# EAGLE board SmartWatch_PCB (EAGLE 9.7.0)
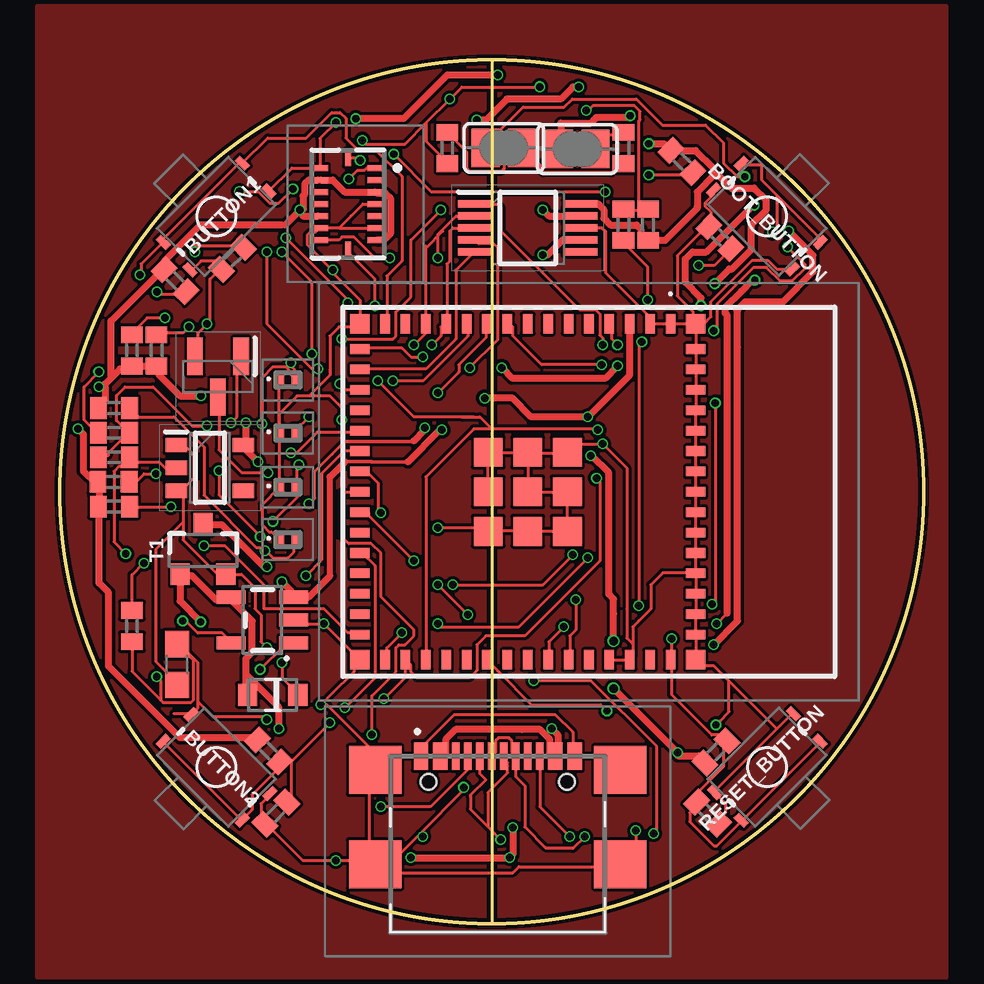
[diagram p0: board, top side]
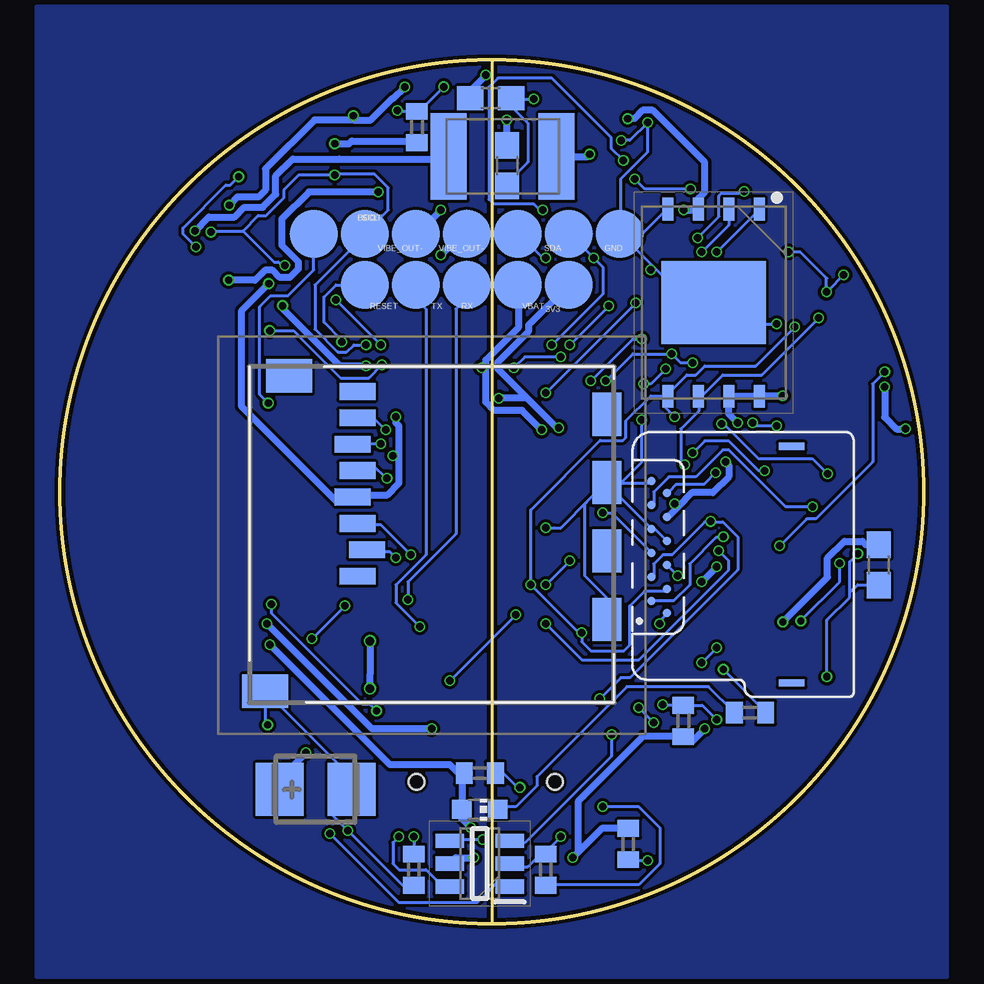
[diagram p1: board, bottom side, seen from below]

Size 36 x 36 mm. Coordinates in mm from the lower left corner, seen from the top.
Outline: circle at 18,18 radius 18
Copper layers (1*16): Top 0.035mm / dielectric 1.6mm / Bottom 0.035mm
Design rules "jlcpcb-2layers *": minimum track width 5mil, minimum drill 0.3mm, track to track 5mil, track to pad 5mil, pad to pad 5mil, via to via 5mil, smd to smd 5mil, copper to edge 0.15mm, drill to drill 0.3mm, minimum pad ring 10mil, minimum via ring 3mil, stop-mask expansion 4mil, vias tented up to drill 0mil, thermal gap 10mil

## Footprints (pad centres in the part's own frame; a part is rotated, then mirrored left to right if it is on the bottom)
SPARKFUN-SWITCHES_TACTILE_SWITCH_SMD_4.6X2.8MM = smd 0.3 x 0.6: 1 -2.355,-0.8; 2 2.304,-0.8; 3 2.33,0.8; 4 -2.329,0.8
EAGLE-LTSPICE_C0402 = smd 0.7 x 0.9: 1 -0.65,0; 2 0.65,0
RCL_C0603 = smd 1.1 x 1: 1 -0.85,0; 2 0.85,0
CT3528 = smd 2 x 2.2: + -1.5,0; - 1.5,0
ADAFRUIT_CHIP-LED0603 = smd 0.8 x 0.8: A 0,-0.75; C 0,0.75
AVX---SD0805S020S1R0_AVX_SD0805S020S1R0_0 = smd 0.8 x 0.9: 1 -1.05,0; 2 1.05,0
PESD5V0S1BL315 = smd 0.4 x 0.7: 1 -0.35,0; 2 0.35,0
SOT95P280X145-6N = smd 1.2 x 0.6: 1 -1.25,0.95; 2 -1.25,0; 3 -1.25,-0.95; 4 1.25,-0.95; 5 1.25,0; 6 1.25,0.95
SON127P800X600X80-9N = smd 0.95 x 0.45: 1 -3.9,1.905; 2 -3.9,0.635; 3 -3.9,-0.635; 4 -3.9,-1.905; 5 3.9,-1.905; 6 3.9,-0.635; 7 3.9,0.635; 8 3.9,1.905 | smd 3.45 x 4.35: 9 0,0
BMI085 = smd 0.675 x 0.25: 1 1.165,1.5; 2 1.165,1; 3 1.165,0.5; 4 1.165,0; 5 1.165,-0.5; 6 1.165,-1; 7 1.165,-1.5; 9 -1.165,-1.5; 10 -1.165,-1; 11 -1.165,-0.5; 12 -1.165,0; 13 -1.165,0.5; 14 -1.165,1; 15 -1.165,1.5 | smd 0.25 x 0.675: 8 0,-1.915; 16 0,1.915
SOT95P280X120-5N = smd 0.9 x 0.6: 1 -1.4,0.95; 2 -1.4,0; 3 -1.4,-0.95; 4 1.4,-0.95; 5 1.4,0.95
ESP32S3MINI1N8 = smd 0.8 x 0.4: 1 -7,5.95; 2 -7,5.1; 3 -7,4.25; 4 -7,3.4; 5 -7,2.55; 6 -7,1.7; 7 -7,0.85; 8 -7,0; 9 -7,-0.85; 10 -7,-1.7; 11 -7,-2.55; 12 -7,-3.4; 13 -7,-4.25; 14 -7,-5.1; 15 -7,-5.95; 31 7,-5.95; 32 7,-5.1; 33 7,-4.25; 34 7,-3.4; 35 7,-2.55; 36 7,-1.7; 37 7,-0.85; 38 7,0; 39 7,0.85; 40 7,1.7; 41 7,2.55; 42 7,3.4; 43 7,4.25; 44 7,5.1; 45 7,5.95 | smd 0.4 x 0.8: 16 -5.95,-7; 17 -5.1,-7; 18 -4.25,-7; 19 -3.4,-7; 20 -2.55,-7; 21 -1.7,-7; 22 -0.85,-7; 23 0,-7; 24 0.85,-7; 25 1.7,-7; 26 2.55,-7; 27 3.4,-7; 28 4.25,-7; 29 5.1,-7; 30 5.95,-7; 46 5.95,7; 47 5.1,7; 48 4.25,7; 49 3.4,7; 50 2.55,7; 51 1.7,7; 52 0.85,7; 53 0,7; 54 -0.85,7; 55 -1.7,7; 56 -2.55,7; 57 -3.4,7; 58 -4.25,7; 59 -5.1,7; 60 -5.95,7 | smd 1.2 x 1.2: 61 0,0; 66 -1.65,1.65; 67 -1.65,0; 68 -1.65,-1.65; 69 0,-1.65; 70 1.65,-1.65; 71 1.65,0; 72 1.65,1.65; 73 0,1.65 | smd 0.8 x 0.8: 62 -7,7; 63 -7,-7; 64 7,-7; 65 7,7
SOP50P490X110-10N = smd 1.4 x 0.3: 1 -2.2,1; 2 -2.2,0.5; 3 -2.2,0; 4 -2.2,-0.5; 5 -2.2,-1; 6 2.2,-1; 7 2.2,-0.5; 8 2.2,0; 9 2.2,0.5; 10 2.2,1
PCA6LA12HL3TR = smd 0.35 x 0.35: 1 -0.95,-6.25; 2 -0.45,-5.6; 3 0.05,-6.25; 4 0.55,-5.6; 5 1.05,-6.25; 6 1.55,-5.6; 7 2.05,-6.25; 8 2.55,-5.6; 9 3.05,-6.25; 10 3.55,-5.6; 11 4.05,-6.25; 12 4.55,-5.6 | smd 0.3 x 1.073: MP1 -2.392,-0.4; MP2 7.47,-0.4
USB4110GFA = smd 0.3 x 1.15: A1 -3.35,3.678; A4 -2.55,3.678; A5 -1.25,3.678; A6 -0.25,3.678; A7 0.25,3.678; A8 1.25,3.678; A9 2.55,3.678; A12 3.35,3.678; B1 3.05,3.678; B4 2.25,3.678; B5 1.75,3.678; B6 0.75,3.678; B7 -0.75,3.678; B8 -1.75,3.678; B9 -2.25,3.678; B12 -3.05,3.678 | smd 2.18 x 2: MP1 -5.11,-0.827; MP2 5.11,-0.827; MP3 -5.11,3.103; MP4 5.11,3.103 | hole 0.65: -2.89,2.603; 2.89,2.603
112ATAARR03ATTEND = smd 1.8 x 1.2: G1 10.6,10.4; G2 4.9,10.4; S1 7.75,10.4; S2 2.05,10.4 | smd 1.4 x 1.9: G3 13.6,-3.85; G4 0.45,-2.85 | smd 0.7 x 1.5: P1 8.8,0; P2 7.7,0.4; P3 6.6,0; P4 5.5,-0.2; P5 4.4,0; P6 3.3,-0.2; P7 2.2,0; P8 1.1,0
SPARKFUN-IC-POWER_SOT23-5 = smd 0.55 x 1.2: 1 -0.95,-1.3; 2 0,-1.3; 3 0.95,-1.3; 4 0.95,1.3; 5 -0.95,1.3
VARISTOR_CT/CN1812 = smd 1.5 x 3.6: 1 -2.25,0; 2 2.25,0
SOT96P240X120-3N = smd 1.55 x 0.65: 1 -0.85,0.96; 2 -0.85,-0.96; 3 0.85,0
EAGLE-LTSPICE_R0402 = smd 0.7 x 0.9: 1 -0.65,0; 2 0.65,0
SJ = smd 1.168 x 1.6: 1 -0.762,0; 2 0.762,0
SPARKFUN-DISCRETESEMI_SOT23-3 = smd 0.8 x 0.9: 1 -0.95,-1; 2 0.95,-1; 3 0,1.1
TP20R = smd 2 x 2: TP 0,0

## Placement (x,y rotation side)
BOOT_BUTTON  [SPARKFUN-SWITCHES_TACTILE_SWITCH_SMD_4.6X2.8MM]  29.48,29.48 315 top
BUTTON1  [SPARKFUN-SWITCHES_TACTILE_SWITCH_SMD_4.6X2.8MM]  6.52,29.48 45 top
BUTTON2  [SPARKFUN-SWITCHES_TACTILE_SWITCH_SMD_4.6X2.8MM]  6.52,6.52 135 top
C1  1uF  [EAGLE-LTSPICE_C0402]  23.49,29.13 90 top
C1_BAT  4.7uF  [EAGLE-LTSPICE_C0402]  12.31,3.31 270 bottom
C1_BAT1  4.7uF 0603  [RCL_C0603]  4.88,10.8 90 top
C1_BAT2  4.7uF 0603  [RCL_C0603]  18.04,34.4 0 bottom
C2  1uF  [EAGLE-LTSPICE_C0402]  24.52,29.13 90 top
C2_BAT  4.7uF  [RCL_C0603]  17.36,31.59 270 bottom
C3  100uF TANT C  [CT3528]  25.34,5.59 0 bottom
C4  100nF  [EAGLE-LTSPICE_C0402]  21.12,33.2 90 bottom
C4_USB  100nF  [EAGLE-LTSPICE_C0402]  18.5,6.27 0 bottom
C5  1uF  [EAGLE-LTSPICE_C0402]  27,4.6 315 top
C5_USB  4.7uF 0603  [RCL_C0603]  1.87,14.95 270 bottom
C6  100nF  [EAGLE-LTSPICE_C0402]  27.51,28.59 135 top
C7  100nF  [EAGLE-LTSPICE_C0402]  7.19,27.73 225 top
C8  100nF  [EAGLE-LTSPICE_C0402]  9,4.6 225 top
CHG_LED  [ADAFRUIT_CHIP-LED0603]  18.5,4.76 270 bottom
D1  AVX---SD0805S020S1R0_AVX_SD0805S020S1R0AVX_SD0805S020S1R0_0_0  [AVX---SD0805S020S1R0_AVX_SD0805S020S1R0_0]  8.87,9.53 180 top
D2  PESD3V3S1BLYL  [PESD5V0S1BL315]  9.5,22.66 0 top
D3  PESD3V3S1BLYL  [PESD5V0S1BL315]  9.5,20.45 0 top
D4  PESD3V3S1BLYL  [PESD5V0S1BL315]  9.5,18.19 0 top
D5  PESD3V3S1BLYL  [PESD5V0S1BL315]  9.5,16 0 top
D6  USBLC6-2SC6Y  [SOT95P280X145-6N]  18.5,2.5 180 bottom
IC2  W25Q256JVEIQ  [SON127P800X600X80-9N]  8.75,25.88 270 bottom
IC3  BMI085  [BMI085]  12,30 0 top
IC4  XC6220A331MR-G  [SOT95P280X120-5N]  6.25,19 0 top
IC5  ESP32-S3-MINI-1-N8  [ESP32S3MINI1N8]  19.5,18 270 top
IC6  DRV2605LDGST  [SOP50P490X110-10N]  19.5,29 0 top
J1  PCA-6-LA-12-HL-3-T_R  [PCA6LA12HL3TR]  5.1,17.5 270 bottom
J2  USB4110-GF-A  [USB4110GFA]  18.25,3.3 0 top
J3  112A-TAAR-R03_ATTEND  [112ATAARR03ATTEND]  23.6,23.28 270 bottom
MCP73831  SPARKFUN-IC-POWER_MCP73831  [SPARKFUN-IC-POWER_SOT23-5]  8.44,12.65 90 top
PFMF.050.1  500mA  [VARISTOR_CT/CN1812]  17.54,31.98 180 bottom
Q1  2N7002  [SOT96P240X120-3N]  6.59,22.8 270 top
R1-ESP  10K  [EAGLE-LTSPICE_R0402]  27.35,7.15 225 top
R1-ESP1  10K  [EAGLE-LTSPICE_R0402]  25.93,31.77 135 top
R1-ESP2  10K  [EAGLE-LTSPICE_R0402]  4.8,26.8 135 top
R1-ESP3  10K  [EAGLE-LTSPICE_R0402]  8.7,7.2 135 top
R1-USB  5K1  [EAGLE-LTSPICE_R0402]  15.75,2.25 90 bottom
R1_BAT  200  [EAGLE-LTSPICE_R0402]  7.23,8.79 180 bottom
R1_PWRUSB  100K  [EAGLE-LTSPICE_R0402]  10.02,8.45 270 bottom
R2-USB  5K1  [EAGLE-LTSPICE_R0402]  21.25,2.25 90 bottom
R2_BAT  2K  [EAGLE-LTSPICE_R0402]  3,12.4 90 top
R4  10K  [EAGLE-LTSPICE_R0402]  2.25,21.49 180 top
R5  10K  [EAGLE-LTSPICE_R0402]  3,23.89 270 top
R6  10K  [EAGLE-LTSPICE_R0402]  4.03,23.89 270 top
R6-ESP1  100K  [EAGLE-LTSPICE_R0402]  23.49,32.33 90 top
R7-ESP1  100K  [EAGLE-LTSPICE_R0402]  16.15,32.33 90 top
R8  10K  [EAGLE-LTSPICE_R0402]  2.23,18.41 180 top
R9  22  [EAGLE-LTSPICE_R0402]  2.25,17.38 0 top
R11  10K  [EAGLE-LTSPICE_R0402]  2.25,20.46 180 top
R12  10K  [EAGLE-LTSPICE_R0402]  2.25,19.44 180 top
RESET_BUTTON  [SPARKFUN-SWITCHES_TACTILE_SWITCH_SMD_4.6X2.8MM]  29.48,6.52 225 top
SJ1  [SJ]  21.56,32.28 180 top
SJ2  [SJ]  18.5,32.34 0 top
T1  20V/4.2A/52mΩ/1.4W  [SPARKFUN-DISCRETESEMI_SOT23-3]  5.97,15.55 0 top
TP1  TPTP20R  [TP20R]  21.17,28.76 0 bottom
TP2  TPTP20R  [TP20R]  19.04,28.76 180 bottom
TP3  TPTP20R  [TP20R]  14.79,26.62 0 bottom
TP4  TPTP20R  [TP20R]  12.66,28.75 0 bottom
TP5  TPTP20R  [TP20R]  16.91,26.63 0 bottom
TP6  TPTP20R  [TP20R]  16.91,28.76 0 bottom
TP7  TPTP20R  [TP20R]  14.79,28.75 0 bottom
TP8  TPTP20R  [TP20R]  25.42,28.75 0 bottom
TP9  TPTP20R  [TP20R]  23.3,26.63 0 bottom
TP10  TPTP20R  [TP20R]  23.3,28.76 0 bottom
TP11  TPTP20R  [TP20R]  19.04,26.63 0 bottom
TP12  TPTP20R  [TP20R]  21.17,26.63 0 bottom

## Library data of the parts
BOOT_BUTTON BUTTON1 BUTTON2 RESET_BUTTON = Library_Buttons; PROD_ID: SWCH-14139; SF_SKU: COM-08720
C1 C1_BAT C2 C4 C4_USB C5-C8 = Hector_Watch; SPICEMODEL: NONE; SPICEPREFIX: C
C1_BAT1 C1_BAT2 C2_BAT C3 C5_USB = Hector_Watch; SPICEPREFIX: C
CHG_LED PFMF.050.1 SJ1 SJ2 TP1 TP2 TP4-TP6 TP10 = Hector_Watch
D1 = Hector_Watch; CENTROID_NOT_SPECIFIED: No; DATASHEET: http://datasheets.avx.com/schottky.pdf; DIGIKEY_DESCRIPTION: DIODE SCHOTTKY 20V 1A 0805; DIGIKEY_PART_NUMBER: 478-7800-1-ND; LEAD_FREE: yes; MF: AVX; MOUSER_PART_NUMBER: 581-SD0805S020S1R0; MPN: SD0805S020S1R0; PACKAGE: 0805 (2012 metric); PREFIX: D; ROHS: yes; TEMPERATURE_RANGE_HIGH: +125°C; TEMPERATURE_RANGE_LOW: -55°C
D2-D5 = Hector_Watch; ARROW_PART_NUMBER: PESD3V3S1BLYL; ARROW_PRICE-STOCK: https://www.arrow.com/en/products/pesd3v3s1blyl/nexperia?region=nac; DESCRIPTION: PESD3V3S1BL - Low capacitance bidirectional ESD protection diode; HEIGHT: 0mm; MANUFACTURER_NAME: Nexperia; MANUFACTURER_PART_NUMBER: PESD3V3S1BLYL; MOUSER_PART_NUMBER: 771-PESD3V3S1BLYL; MOUSER_PRICE-STOCK: https://www.mouser.co.uk/ProductDetail/Nexperia/PESD3V3S1BLYL?qs=vLWxofP3U2zWoKHYJMVoKQ%3D%3D
D6 = Hector_Watch; ARROW_PART_NUMBER: USBLC6-2SC6Y; ARROW_PRICE-STOCK: https://www.arrow.com/en/products/usblc6-2sc6y/stmicroelectronics?region=nac; DESCRIPTION: Low Cap. ESD Protection Auto SOT-23-6 STMicroelectronics USBLC6-2SC6Y, Dual Uni-Directional TVS Diode Array, 6-Pin SOT-23; HEIGHT: 1.45mm; MANUFACTURER_NAME: STMicroelectronics; MANUFACTURER_PART_NUMBER: USBLC6-2SC6Y; MOUSER_PART_NUMBER: 511-USBLC6-2SC6Y; MOUSER_PRICE-STOCK: https://www.mouser.co.uk/ProductDetail/STMicroelectronics/USBLC6-2SC6Y?qs=gNDSiZmRJS%2FOgDexvXkdow%3D%3D
IC2 = Hector_Watch; ARROW_PART_NUMBER: W25Q256JVEIQ; ARROW_PRICE-STOCK: https://www.arrow.com/en/products/w25q256jveiq/winbond-electronics?region=nac; DESCRIPTION: 256M-bit Serial Flash Memory with uniform 4KB sectors and Dual/Quad SPI; HEIGHT: 0.8mm; MANUFACTURER_NAME: Winbond; MANUFACTURER_PART_NUMBER: W25Q256JVEIQ; MOUSER_PART_NUMBER: 454-W25Q256JVEIQ; MOUSER_PRICE-STOCK: https://www.mouser.co.uk/ProductDetail/Winbond/W25Q256JVEIQ?qs=qSfuJ%252Bfl%2Fd4o%2FNFUf7yCgA%3D%3D
IC3 = Hector_Watch; ARROW_PART_NUMBER: BMI085; ARROW_PRICE-STOCK: https://www.arrow.com/en/products/bmi085/bosch; DESCRIPTION: IMUs - Inertial Measurement Units High-performance IMU BMI085 for virtual and augmented reality applications; HEIGHT: 1mm; MANUFACTURER_NAME: BOSCH; MANUFACTURER_PART_NUMBER: BMI085; MOUSER_PART_NUMBER: 262-BMI085; MOUSER_PRICE-STOCK: https://www.mouser.co.uk/ProductDetail/Bosch-Sensortec/BMI085?qs=y6ZabgHbY%252ByGCM8LfWZyqA%3D%3D
IC4 = Hector_Watch; DESCRIPTION: LDO Voltage Regulators; HEIGHT: 1.2mm; MANUFACTURER_NAME: Torex; MANUFACTURER_PART_NUMBER: XC6220A331MR-G; MOUSER_PART_NUMBER: 865-XC6220A331MR-G; MOUSER_PRICE-STOCK: https://www.mouser.co.uk/ProductDetail/Torex-Semiconductor/XC6220A331MR-G?qs=AsjdqWjXhJ8ZSWznL1J0gg%3D%3D
IC5 = Hector_Watch; DESCRIPTION: WiFi Development Tools - 802.11 [Engineering Samples] SMD Module, ESP32-S3FN8, 8 MB SPI Flash, PCB Antenna; HEIGHT: 2.55mm; MANUFACTURER_NAME: Espressif Systems; MANUFACTURER_PART_NUMBER: ESP32-S3-MINI-1-N8; MOUSER_PART_NUMBER: 356-ESP32-S3-MINI1N8; MOUSER_PRICE-STOCK: https://www.mouser.co.uk/ProductDetail/Espressif-Systems/ESP32-S3-MINI-1-N8?qs=XAiT9M5g4x82rl6F%2FIYUQg%3D%3D
IC6 = Hector_Watch; ARROW_PART_NUMBER: DRV2605LDGST; ARROW_PRICE-STOCK: https://www.arrow.com/en/products/drv2605ldgst/texas-instruments?region=nac; DESCRIPTION: ERM & LRA Device Haptic Driver 2-5V BGA9 Texas Instruments DRV2605LDGST Piezo Haptic Motor Driver IC, 5 V, 10-Pin VSSOP; HEIGHT: 1.1mm; MANUFACTURER_NAME: Texas Instruments; MANUFACTURER_PART_NUMBER: DRV2605LDGST; MOUSER_PART_NUMBER: 595-DRV2605LDGST; MOUSER_PRICE-STOCK: https://www.mouser.co.uk/ProductDetail/Texas-Instruments/DRV2605LDGST?qs=asCBFxFfL1TjvcNdZsR2BA%3D%3D
J1 = Library_LCD; DESCRIPTION: CONN FFC BOTTOM 12POS 0.5MM R/A; HEIGHT: 2.808mm; MANUFACTURER_NAME: Adam Tech; MANUFACTURER_PART_NUMBER: PCA-6-LA-12-HL-3-T/R
J2 = Hector_Watch; DESCRIPTION: CONN USB 2.0 TYPE-C R/A SMT; HEIGHT: 3.26mm; MANUFACTURER_NAME: GCT (GLOBAL CONNECTOR TECHNOLOGY); MANUFACTURER_PART_NUMBER: USB4110-GF-A; MOUSER_PART_NUMBER: 640-USB4110-GF-A; MOUSER_PRICE-STOCK: https://www.mouser.co.uk/ProductDetail/GCT/USB4110-GF-A?qs=KUoIvG%2F9IlYiZvIXQjyJeA%3D%3D
J3 = Hector_Watch; DESCRIPTION: Micro SD Card Socket, Push-Push Type, Top Mount, SMT, H=1.83mm, 10u; HEIGHT: 1.9mm; MANUFACTURER_NAME: ATTEND; MANUFACTURER_PART_NUMBER: 112A-TAAR-R03 ATTEND
MCP73831 = Hector_Watch; PROD_ID: IC-09995
Q1 = Hector_Watch; ARROW_PART_NUMBER: 2N7002; ARROW_PRICE-STOCK: https://www.arrow.com/en/products/2n7002/on-semiconductor?region=europe; DESCRIPTION: N-channel MOSFET,2N7002 0.115A 60V; HEIGHT: 1.2mm; MANUFACTURER_NAME: onsemi; MANUFACTURER_PART_NUMBER: 2N7002; MOUSER_PART_NUMBER: 512-2N7002; MOUSER_PRICE-STOCK: https://www.mouser.co.uk/ProductDetail/onsemi-Fairchild/2N7002?qs=0dwsXDNhqlz66WJJhrTFjQ%3D%3D
R1-ESP R1-ESP1-R1-ESP3 R1-USB R1_BAT R1_PWRUSB R2-USB R2_BAT R4-R6 R6-ESP1 R7-ESP1 R8 R9 R11 R12 = Hector_Watch; SPICEMODEL: NONE; SPICEPREFIX: R
T1 = Hector_Watch; PROD_ID: TRAN-14388
TP3 = Hector_Watch; TP_SIGNAL_NAME: 3V3
TP7 = Hector_Watch; TP_SIGNAL_NAME: SDA
TP8 = Hector_Watch; TP_SIGNAL_NAME: PPG_INT
TP9 = Hector_Watch; TP_SIGNAL_NAME: RESET
TP11 = Hector_Watch; TP_SIGNAL_NAME: RX
TP12 = Hector_Watch; TP_SIGNAL_NAME: TX

## Nets
3V3: C1_BAT2.1 C2.1 C3.+ C4.1 IC2.3 IC2.7 IC2.8 IC3.3 IC3.7 IC3.11 IC3.14 IC4.5 IC5.3 IC6.10 J1.4 J3.P4 R1-ESP1.2 R1-ESP2.2 R1-ESP3.2 R1-ESP.2 R4.2 R5.2 R6.2 R8.2 R9.1 TP3.TP
ADC_BAT: IC5.9 SJ2.1
BOOT: BOOT_BUTTON.3 BOOT_BUTTON.4 C6.1 IC5.4 R1-ESP1.1 TP10.TP
BUTTON1: BUTTON1.3 BUTTON1.4 C7.1 IC5.15 R1-ESP2.1
BUTTON2: BUTTON2.3 BUTTON2.4 C8.1 IC5.26 R1-ESP3.1
D+: D6.1 IC5.24
D-: D6.3 IC5.23
DISP_RST: IC5.20 J1.11
DN: D6.4 J2.A7 J2.B7
DP: D6.6 J2.A6 J2.B6
EN_DRV: IC5.17 IC6.5
GND: BOOT_BUTTON.1 BOOT_BUTTON.2 BUTTON1.1 BUTTON1.2 BUTTON2.1 BUTTON2.2 C1.2 C1_BAT1.2 C1_BAT2.2 C1_BAT.2 C2.2 C2_BAT.2 C3.- C4.2 C4_USB.2 C5.2 C5_USB.2 C6.2 C7.2 C8.2 D2.1 D3.1 D4.1 D5.1 D6.2 IC2.4 IC2.9 IC3.4 IC3.6 IC3.10 IC3.15 IC4.2 IC5.1 IC5.2 IC5.42 IC5.43 IC5.46 IC5.47 IC5.48 IC5.49 IC5.50 IC5.51 IC5.52 IC5.53 IC5.54 IC5.55 IC5.56 IC5.57 IC5.58 IC5.59 IC5.60 IC5.61 IC5.62 IC5.63 IC5.64 IC5.65 IC5.66 IC5.67 IC5.68 IC5.69 IC5.70 IC5.71 IC5.72 IC5.73 IC6.8 J1.1 J1.5 J1.6 J1.12 J2.A1 J2.A12 J2.B1 J2.B12 J2.MP1 J2.MP2 J2.MP3 J2.MP4 J3.G1 J3.G2 J3.G3 J3.P6 MCP73831.2 Q1.2 R1-USB.2 R1_PWRUSB.1 R2-USB.1 R2_BAT.1 R7-ESP1.1 R12.1 RESET_BUTTON.1 RESET_BUTTON.2 TP4.TP
IMU_INT1: IC3.16 IC5.11
IMU_INT2: IC3.1 IC5.10
IN_DRV: IC5.16 IC6.4
LEDA: J1.3 R9.2
LEDK: J1.2 Q1.3
MISO: D2.2 IC2.2 IC5.33 J3.P7 R8.1
MOSI: D3.2 IC2.5 IC5.31 J1.10 J3.P3 R6.1
N$1: Q1.1 R11.1 R12.2
N$2: C1_BAT1.1 D1.1 IC4.1 IC4.3 T1.2
N$3: R6-ESP1.1 R7-ESP1.2 SJ2.2
N$4: J2.A5 R1-USB.1
N$5: R6-ESP1.2 SJ1.1
N$6: J2.B5 R2-USB.2
N$7: MCP73831.5 R2_BAT.2
N$12: MCP73831.1 R1_BAT.1
N$13: C1.1 IC6.1
N$14: CHG_LED.C R1_BAT.2
PIN_LED: IC5.30 R11.2
PPG_INT: IC5.36 TP8.TP
RESET: C5.1 IC5.45 R1-ESP.1 RESET_BUTTON.3 RESET_BUTTON.4 TP9.TP
RX: IC5.40 TP11.TP
SCK: D4.2 IC2.6 IC5.32 J1.9 J3.P5 R5.1
SCL: IC3.8 IC5.13 IC6.2 TP6.TP
SDA: IC3.9 IC5.12 IC6.3 TP7.TP
SS: D5.2 J3.P2 R4.1
SS_FLASH: IC2.1 IC5.18
SS_SD: IC5.7
SS_TFT: IC5.21 J1.8
TFT_DC: IC5.22 J1.7
TX: IC5.39 TP12.TP
VBAT: C2_BAT.1 MCP73831.3 SJ1.2 T1.3 TP5.TP
VBUS: C1_BAT.1 C4_USB.1 C5_USB.1 CHG_LED.A D1.2 D6.5 MCP73831.4 PFMF.050.1.2 R1_PWRUSB.2 T1.1
VIBE_OUT+: IC6.9 TP1.TP
VIBE_OUT-: IC6.7 TP2.TP
VUSB: J2.A4 J2.A9 J2.B4 J2.B9 PFMF.050.1.1

## Tracks (layer width: path | path; a pad name or v marks a point on that pad's centre or on a via)
3V3  (via drill 0.3, 0.35)
  Top 0.127: IC6.10 21.75,30 | v25.75,7.12 25.75,7 | 26.62,7 R1-ESP.2 | 1.62,17.5 R9.1 1.62,17.38 | 1.62,18.38 R8.2 | R1-ESP3.2 8.12,7.75 | 13.25,28.5 IC3.7 | 10.12,29.5 10.12,29.75 v10,29.75 | 10.75,29.5 IC3.11 | 10.75,31 IC3.14 10.88,31 | 13.12,30.5 IC3.3 13.21,30.46 | 7.75,19.75 7.75,19.88 IC4.5 7.75,20 | 1.88,21.75 1.62,21.5 R4.2 | 1.88,22.5 1.88,22.38 | 3,23.12 R5.2 | 4,23.25 R6.2 4.12,23.12 | 4.25,27.25 R1-ESP2.2 4.38,27.38 | 9.38,29.12 9.25,29.12 | 14.72,20.09 14.75,20.12 | 11.88,20.09 11.35,19.57 10.62,18.84 10.62,17.75
  Top 0.15: v10.38,17.5 10.62,17.75 | 14.72,20.09 13,20.09 12.98,20.1 11.89,20.1 11.88,20.09
  Top 0.3: 25.75,7 26.62,7 | IC5.3 23.75,23.08 23.75,22.88 v22,21.12 19.64,21.12 18.87,21.9 v17.71,21.9 | 23.75,9.12 24.06,8.82 | 24.06,8.82 24.69,8.18 v25.75,7.12 | 1.62,18.38 1.62,17.5 | 1.62,17.38 1.62,15.46 1.62,14.19 2.02,13.79 2.02,10.73 5,7.75 8.12,7.75 | 10.12,29.5 10.75,29.5 | 10.75,31 10.38,31 10.21,30.84 10.21,30.42 10.12,30.33 10.12,29.75 | v18.25,35.38 16.14,35.38 14.33,33.56 v12.33,33.56 | v8.25,19.25 7.75,19.75 | 7.75,20 v7.75,20.88 | 1.88,21.75 1.88,22.38 v1.62,22.38 | 2.12,22.75 2.5,23.12 3,23.12 | 2.12,22.75 1.88,22.5 | R5.2 4,23.25 | 4.25,27.25 2.12,25.12 2.12,22.75 | v5.88,22 5,22 4.12,22.88 4.12,23.12 | v10,29.75 9.38,29.12 | v0.75,20.62 0.97,20.4 0.97,18.87 1.51,18.34 R8.2 | 4.38,27.38 4.38,27.65 5.85,29.12 9.25,29.12 | v27.3,26.68 27.9,27.29 28.01,27.29 28.82,28.1 28.82,29.13 29.44,29.74 29.44,30.16 28.94,30.66 28.91,30.63 | 21.75,30 22.44,30 22.68,29.77 22.68,29.4 22.95,29.12 24.04,29.12 24.21,28.95 24.21,28.78 C2.1 25.23,28.48 26.54,29.79 | 24.6,32.46 v24.55,32.51 25.19,32.51 R1-ESP1.2 26.5,32.23 27.24,31.49 27.24,31.18 | 26.54,29.79 26.56,29.81 | 26.56,29.9 26.56,29.81 | 26.54,29.79 26.56,29.81 | 26.56,29.81 26.56,29.88 | 28.91,30.63 | 26.56,29.81 26.56,30.5 27.24,31.18 | v23.08,11.78 23.08,12.92 23.08,13.53 22.88,13.73 22.88,18.8 22.18,19.5 v22.12,19.5 | 24.06,8.82 v23.08,9.79 | 13.21,30.46 13.56,30.46 13.78,30.24 13.78,28.76 13.52,28.5 13.25,28.5 | 28.91,30.63 28.09,30.63 28.01,30.63 27.47,31.18 27.24,31.18 | v15.21,20.67 15.21,20.58 14.75,20.12 | 10.88,31 11.37,31 11.87,30.5 13.12,30.5
  Bottom 0.127: 21.12,32.62 C4.1 | 26.75,5.62 C3.+ | 23.75,17.88 J3.P4 23.88,17.75 24,17.62 24.5,17.62 | 21.88,19.75 v22.12,19.5 | 9.5,29.75 IC2.3 | 9.38,29.88 9.38,30.25 | 18.88,34.5 C1_BAT2.1 | 6.88,22 IC2.8 6.75,22 | v8.25,19.25 8.12,19.12 | 10.62,17 J1.4 | 8.12,21.88 IC2.7 | 16.48,21.86 16.52,21.9 | 10.25,17.38 v10.38,17.5
  Bottom 0.3: v25.75,7.12 26.75,6.12 26.75,5.62 | v22,21.12 22,20.88 21.88,20.75 21.88,19.75 21.88,18.78 21.87,18.77 21.87,18.36 22.35,17.88 23.75,17.88 | v10,29.75 9.5,29.75 | 18.88,34.5 18.88,34.75 v18.25,35.38 | 9.38,30.25 9.12,30.5 9.12,31.73 11.29,33.9 11.71,33.9 12.05,33.56 v12.33,33.56 | IC2.3 9.38,29.88 | 6.88,22 8,22 IC2.7 | 10.62,17 10.25,17.38 9.66,17.96 8.78,17.96 8.12,18.62 8.12,19.12 | 8.12,21.88 8.12,21.25 v7.75,20.88 | v5.88,22 6.75,22 | v1.62,22.38 1.62,21.11 1.14,20.62 v0.75,20.62 | 17.11,22.49 17.22,22.59 | 17.22,22.59 17.75,23.12 17.75,23.4 16.45,24.7 16.45,24.96 TP3.TP | 16.52,21.9 v17.71,21.9 | 17.22,22.59 16.48,21.86 15.29,20.67 v15.21,20.67 | 24.5,17.62 28.42,21.54 28.42,25.56 v27.3,26.68 | 21.12,32.62 23.84,32.62 23.96,32.51 v24.55,32.51 | v23.08,11.78 23.08,10.38 v23.08,9.79
ADC_BAT  (via drill 0.3)
  Top 0.127: IC5.9 18.75,25 18.88,24.88 18.88,24.5 20.08,23.29 v22.58,23.29 | SJ2.1 17.74,32.47 19.3,34.03 21.02,34.03 21.36,34.38 24.03,34.38 25.11,33.29 26.91,33.29 27.66,32.54 27.66,31.7 28.23,31.14 v28.55,31.14 | v27.25,24.71 27.39,24.85 27.39,25.83 28.26,26.69 28.91,27.35 29.46,27.35 30.02,26.78 30.52,26.78 31.05,27.31 31.05,27.49 v30.33,28.21
  Bottom 0.127: v22.58,23.29 23.12,22.75 24.31,22.75 25.76,24.21 26.27,24.71 v27.25,24.71 | v30.33,28.21 30.88,28.75 30.88,29 29.09,30.79 28.91,30.79 v28.55,31.14
BOOT  (via drill 0.3)
  Top 0.127: IC5.4 23,25 23,24.38 v23.25,24.13 v23.25,24.12 | 29.88,30.38 31.62,28.62 31.62,28.5 BOOT_BUTTON.3 | 29.88,30.38 29.25,31 29.25,31.62 28.5,31.62 BOOT_BUTTON.4 | v29.71,28.83 29.88,29 29.88,30.38 | C6.1 27.28,27.44 v26.63,27.44
  Top 0.13: R1-ESP1.1 26.29,31.21 25.62,31.21 v24.55,31.21 25.11,31.21
  Bottom 0.127: v23.25,24.12 23.75,24.12 24.04,23.83 24.43,23.83 25.38,24.78 25.38,26.62 23.25,28.75 TP10.TP 22.31,29.74 22.31,30.67 22.89,31.25 24.48,31.25 24.52,31.21 v24.55,31.21 | v29.71,28.83 29.66,28.88 28.38,28.88 | v26.63,27.44 26.75,27.44 26.89,27.58 27.08,27.58 28.38,28.88 | 28.38,28.88 27.73,29.52 27.41,29.52 26.66,30.26 26.66,30.59 26.09,31.16
  Bottom 0.13: 26.09,31.16 26.04,31.21 24.52,31.21
BUTTON1  (via drill 0.3)
  Top 0.127: R1-ESP2.1 5.25,26.25 4.12,26.25 v4.04,26.33 | v5.62,28 5.62,28.25 7.62,28.25 C7.1 | v3.33,27.04 3.38,27.09 3.38,27.5 4.25,28.38 BUTTON1.4 4.31,28.54 7.46,31.69 BUTTON1.3 8.66,32.75 10.27,32.75 11.33,33.81 11.67,33.81 11.92,33.57 11.92,32.75 12.43,32.23 13.17,32.23 14.25,31.15 14.25,27.62 13.62,27 13.62,25.07 IC5.15
  Bottom 0.127: v4.04,26.33 4,26.38 v3.33,27.04
  Bottom 0.13: v4.04,26.33 4.04,26.88 4.03,26.89 5.14,28 v5.62,28
BUTTON2  (via drill 0.3)
  Top 0.127: R1-ESP3.1 9.12,6.62 9.12,6.5 8,5.38 8,4.75 7.62,4.38 BUTTON2.4 7.5,4.38 4.38,7.5 BUTTON2.3 | v11.88,9 13.12,10.25 13.12,14.93 12.6,15.45 IC5.26 | 9.62,6.75 v11.25,8.38 | 9.62,6.75 9.25,6.75 R1-ESP3.1 | 9.62,6.75 9.62,5.25 9.5,5.12 C8.1 | 9.62,6.75 R1-ESP3.1
  Bottom 0.127: v11.88,9 v11.25,8.38
D+  (via drill 0.3)
  Top 0.127: v14.75,15.12 12.88,17 12.88,17.12 12.5,17.12 IC5.24 | v17,12.88 v15.75,14.12 | v24.75,3.75 24.88,3.88 24.88,7.38 22.12,10.12 v19.75,10.12
  Bottom 0.127: v15.75,14.12 v14.75,15.12 | v19.75,10.12 v17,12.88 | v24.75,3.75 21.88,0.88 18.62,0.88 17.88,1.62 17.25,1.62 D6.1
D-  (via drill 0.3)
  Top 0.127: IC5.23 11.75,18 11.75,16.12 12.04,15.84 12.98,15.84 13.38,15.44 13.38,13.62 14.75,12.25 14.75,12 14.38,11.62 14.12,11.62 14,11.5 14,10.5 13,9.5 v13,7.88
  Bottom 0.127: v13,7.88 13,7 16.62,3.38 17.25,3.38 D6.3
DISP_RST  (via drill 0.3)
  Top 0.127: v6.62,18.88 6.62,17.88 8.34,16.16 v8.34,16.12 | IC5.20 12.5,20.5 10.73,20.5 9.86,19.62 v9.62,19.62
  Bottom 0.127: v6.62,18.88 6.88,18.88 8.12,20.12 9.12,20.12 v9.62,19.62 | J1.11 10.43,13.45 9.75,14.12 9.75,15 8.66,16.09 8.37,16.09 v8.34,16.12
DN  (via drill 0.3)
  Top 0.127: 17.75,6 17.5,6.25 J2.B7 | 18.5,6.88 J2.A7 | 17.11,5.3 17.11,4.77 17.92,3.95 v18.37,3.5
  Top 0.13: 17.75,6 17.11,5.36 17.11,5.3 | 18.5,6.88 18.66,6.72 18.66,6.57 18.66,6.28 17.84,5.46 17.84,4.03 17.92,3.95
  Bottom 0.127: v18.37,3.5 19.7,3.5 D6.4
DP  (via drill 0.3)
  Top 0.127: 21.38,3.12 21.41,3.16 v21.88,3.62 | 19.38,4.03 19.38,5.75 19,6.12 19,6.88 J2.B6 18.84,7.14 18.84,7.63 18.73,7.75 18.27,7.75 18.16,7.63 18.16,7.14 J2.A6
  Top 0.13: 19.38,4.03 20.25,3.16 21.41,3.16
  Bottom 0.127: v21.88,3.62 22.12,3.38 22.12,2.5 21.88,2.25 20.75,2.25 20.12,1.62 19.75,1.62 D6.6
EN_DRV
  Top 0.127: IC6.5 17.25,28 16.5,27.25 16.5,24.38 15.25,23.12 12.53,23.12 IC5.17
GND  (via drill 0.3)
  Top 0.127: v24,3.88 24,3.12 23.38,2.5 J2.MP2 23.25,2.38 19.12,2.38 18.88,2.12 13.75,2.12 13.75,2.5 | BUTTON2.1 8.75,5.38 8.38,5 8.38,4.38 8.5,4.25 C8.2 8.62,4.12 10.12,2.62 v11.5,2.62 12.88,2.62 | 12.88,2.62 13.12,2.62 13.12,2.5 J2.MP1 | 13.75,2.5 15,3.75 | 13.75,2.5 13.25,2.5 J2.MP1 | 15,3.75 v15.12,3.62 | 13.75,2.5 J2.MP1 | IC4.2 4.75,19 4.38,19 4.12,19.25 3,19.25 3,19.38 R12.1 2.51,19.05 2.45,19.05 2.25,18.85 2.25,15.91 v2.74,15.42 | 5.75,9.25 5.75,9 5.5,8.75 BUTTON2.2 5.42,8.75 4.75,8.75 | 5.75,9.25 5.75,10.88 5,11.62 C1_BAT1.2 5.57,10.96 5.57,9.32 5.46,9.21 4.3,9.21 4.19,9.32 | 21.38,7 21.5,7 J2.A12 21.62,7 23.25,7 23.25,6.5 J2.MP4 | 21.38,7 J2.B1 21.38,7 | 15.12,7 15,7 J2.A1 14.88,7 13.25,7 | 15.12,7 J2.B12 15.12,7 | 13.25,7 13.25,6.5 J2.MP3 | MCP73831.2 9.75,12.62 9.75,12.5 v11,12.5 12.25,11.25 | 12.25,11.25 IC5.64 12.25,11.25 | 11,9.25 11.25,9.51 12.25,10.5 12.25,11.25 | 11,9.25 v10.88,9.12 11,9.25 | 12.88,7.38 11.39,8.86 | 12.88,7.38 13.25,7 | 13.25,7 J2.MP3 | 12.88,7.38 12.88,2.62 | 12.88,2.62 J2.MP1 | 12.88,7.38 J2.MP3 | 9.12,20.61 9.12,20.5 D3.1 9.12,20.38 9.12,18.25 D4.1 8.44,17.48 8.44,16.61 8.72,16.33 8.82,16.33 D5.1 | 9.12,20.61 9.12,22.62 D2.1 | 11.62,29 10.88,29 IC3.10 10.65,28.82 10.42,28.82 10.31,28.7 10.31,28.3 11.39,27.21 11.39,27.11 | 11.62,29 12.12,29.5 12.62,30 13.12,30 IC3.4 | 11.62,29 13.12,29 IC3.6 | 11.39,27.11 11.25,27.25 v11.38,27.25 | 11.39,27.11 12.5,26 IC5.63 12.5,24.88 11.62,24.88 11.25,24.5 11.25,23.08 11.25,23 | 9.12,20.61 9.12,21.25 9.88,22 10.38,22 11.25,22 11.75,21.5 v11.75,21 | C1.2 23.5,29.75 24.5,29.75 C2.2 24.13,30.17 24.13,33.45 24.19,33.51 24.19,33.86 23.94,34.1 22.23,34.1 22.02,33.9 v21.94,33.9
  Top 0.127: v11.5,33.39 10.84,32.73 IC3.15 9.67,31.5 BUTTON1.2 | BUTTON1.1 5.5,27.25 5.88,27.62 6.62,27.62 6.62,27.38 C7.2 6.62,27.25 6.25,26.88 6.25,25.12 v6.12,25 5.75,24.62 5.75,23.75 Q1.2 | 19.5,16.38 17.88,16.38 IC5.70 17.75,16.38 17.75,16.5 v15.75,16.5 | 19.5,16.38 IC5.71 19.5,16.38 | 19.5,16.38 21.12,16.38 | 21.12,16.38 IC5.72 21.12,16.38 | 19.5,19.62 17.88,19.62 IC5.68 | 19.5,19.62 IC5.67 | 19.5,19.62 IC5.61 21.12,18 | 19.5,19.62 IC5.67 | 21.12,18 IC5.73 21.12,18 | 19.5,19.62 21.12,19.62 IC5.66 21.25,19.75 21.25,20 v22.62,20 23.62,19 23.62,13.12 | 19.5,19.62 IC5.67 | 21.12,18 21.12,16.38 | C5.2 27.5,4.25 27.5,4.38 27.75,4.62 27.75,5 27.38,5.38 RESET_BUTTON.2 27.38,5.5 27.38,5.62 29.88,8.12 | 29.88,8.12 30.5,8.75 RESET_BUTTON.1 | IC5.42 23,11 IC5.43 23.88,11.12 23.88,11.65 23.88,12.38 24.12,12.62 | IC5.49 26.5,14.5 IC5.48 26.5,13 IC5.47 26.5,12.88 26.5,12.12 IC5.46 26.5,12 IC5.65 26.75,10.75 | 24.62,13.12 24.62,14.12 25.12,14.62 26.5,14.62 | 26.5,14.62 IC5.49 | 26.5,14.62 26.5,15.38 IC5.50 26.5,15.5 26.5,16.25 IC5.51 26.5,16.38 26.5,17.12 IC5.52 26.5,17.25 IC5.53 26.5,18.75 IC5.54 26.5,18.88 26.5,19.62 IC5.55 26.5,19.75 26.5,20.5 IC5.56 26.5,20.62 26.5,21.38 IC5.57 26.5,21.5 IC5.58 26.5,23 IC5.59 26.5,23.12 26.5,23.88 IC5.60 26.5,24 IC5.62 | 26.5,14.62 IC5.49 | 27.5,10.5 27.89,10.11 29.88,8.12 | IC5.62 26.38,25 | 26.38,25 25.5,25 IC5.1 25.38,25 24.62,25 IC5.2 24.5,25 24.5,25.38 22.75,27.12 22.75,28.84 22.59,29 IC6.8 | 26.38,25 IC5.62 | v4.03,10.29 4.19,10.13 4.19,9.32 | R2_BAT.1 3,10.51 4.19,9.32 | v20,34.88 16.75,34.88 v16.25,34.38 15.29,33.41 14.38,32.5 12.75,32.5 v12.61,32.65
  Top 0.127: BOOT_BUTTON.2 29.88,27.29 29.51,27.65 28.86,27.65 28.16,26.95 28.15,26.95 27.14,25.94 27.14,25.3 26.84,25 IC5.62 | v27.34,8.28 27.5,8.44 | 26.38,25 26.38,25.51 25.73,26.16 25.73,27.84 26.94,29.05 C6.2 27.12,29.12 27.12,29.67 26.91,29.89 26.91,30.05 27.25,30.39 BOOT_BUTTON.1 | 15.38,32.5 15.68,32.19 16.15,31.73 R7-ESP1.1 | v8.62,8.5 8.5,8.62 6.38,8.62 5.75,9.25 | 15.12,7 15.12,7.4 16.44,8.72 20.64,8.72 21.38,7.98 21.38,7 | 15,3.75 16.83,5.58 v16.83,5.67
  Top 0.13: IC5.69 IC5.68 | 27.5,8.44 27.89,8.83 27.89,10.11 | 27.5,10.5 27.25,10.75 26.75,10.75 | 15.68,32.19 15.29,32.59 15.29,33.41 | 11.39,8.86 11.12,9.12 v10.88,9.12 | 11.25,23.08 11.25,22.87 10.38,22 | 24.62,13.12 23.88,12.38 | 23.62,13.12 23.62,11.9 23.88,11.65
  Bottom 0.127: R2-USB.1 21.25,1.62 21.75,1.62 v24,3.88 24.62,4.5 24.62,4.75 23.88,5.5 C3.- 23.88,5.62 23.88,6.12 27.38,9.62 J3.G3 27.45,8.39 v27.34,8.28 | D6.2 17.12,2.38 16.5,2.38 16,2.88 15.75,2.88 R1-USB.2 15.75,3 v15.12,3.62 | v11.5,2.62 12.25,2.62 C1_BAT.2 | C4_USB.2 17.75,6.25 17.5,6.25 16.92,5.67 v16.83,5.67 | C5_USB.2 1.88,14.12 2.75,14.12 3.08,13.79 3.08,13.6 | v11,12.5 11,12.62 10.75,12.88 J1.12 | v10.88,9.12 10.12,9.12 R1_PWRUSB.1 9.22,9.1 v8.62,8.5 | 17,34.38 17.12,34.38 C1_BAT2.2 17,34.38 | 17,34.38 v16.25,34.38 | 17,34.38 17,33.88 16.5,33.38 16.5,31.75 17.25,31 17.25,30.75 C2_BAT.2 | 12.62,28.75 12,28.75 | 12,28.75 11.75,28.75 10.75,29.75 IC2.4 | 12.62,28.75 TP4.TP | 12.62,28.75 TP4.TP | v6.12,25 7.88,25 IC2.9 8.87,26 9.88,26 11.25,27.38 | 12,28.75 12,28.12 11.25,27.38 | 12,28.75 TP4.TP | 11.25,27.38 v11.38,27.25 | J1.6 10.75,16 11.25,16.5 J1.5 11.38,16.5 13.25,18.38 | J1.1 11.38,18.38 13.12,18.38 J3.G2 | 13.25,18.38 J3.G2 | 14.12,16.5 14.12,14.5 13.25,13.62 13.25,12.75 J3.G1 | 13.25,18.38 13.91,17.72 15.12,16.5 15.39,16.5 v15.75,16.5 | 13.25,18.38 J3.G2 | v22.62,20 23.75,20 J3.P6 | v11.75,21 11.75,19.23 12.6,18.38 J3.G2 | v4.03,10.29 4.03,12.65 3.08,13.6 | v20,34.88 21.03,33.85 C4.2 21.89,33.85 v21.94,33.9 | v2.74,15.42 3.08,15.07 3.08,13.6 | v11.5,33.39 11.5,32.18 12.62,31.05 12.62,28.75
  Bottom 0.13: 14.12,16.5 14.12,17.5 13.91,17.72 | v11.5,33.39 12.25,32.65 v12.61,32.65
IMU_INT1  (via drill 0.3)
  Top 0.127: v15.88,29.75 14.62,28.5 14.62,26.12 14,25.5 14,24.5 13.88,24.38 v11.75,24.38 | v13.88,22.62 15.12,22.62 17,24.5 17,25 IC5.11 | v12.52,31.81 12.42,31.91 IC3.16
  Bottom 0.127: v15.88,29.75 16,29.75 16.25,30.01 17.94,30.01 18.12,30.19 18.12,34.88 17.75,35.25 15.5,35.25 13.02,32.77 13.02,32.32 v12.52,31.81 | v11.75,24.38 12.12,24.38 v13.88,22.62
IMU_INT2  (via drill 0.3)
  Top 0.127: v12,25.88 12,26 v9.42,28.58 | v15.75,22.12 16.62,23 16.62,23.3 17.75,24.43 17.75,25 IC5.10 | v7.48,30.52 8.26,30.52 8.74,30.04 9.12,30.04 v9.71,30.62 | v12.04,31.04 12.4,31.4 12.69,31.4 12.79,31.5 IC3.1
  Bottom 0.127: v15.75,22.12 v12,25.88 | v7.48,30.52 7.55,30.45 8.42,30.45 8.53,30.33 8.53,29.47 v9.42,28.58 | v9.71,30.62 11.62,30.62 v12.04,31.04
IN_DRV  (via drill 0.3)
  Top 0.127: v15.12,23.62 14.62,23.62 14.25,24 12.5,24 IC5.16 | v17.08,23.17 18.25,24.34 18.25,28.17 18.08,28.34 17.46,28.34 IC6.4
  Bottom 0.127: v15.12,23.62 16.62,23.62 v17.08,23.17
LEDA  (via drill 0.3)
  Top 0.127: v4.62,17.38 3,17.38 R9.2
  Bottom 0.127: v4.62,17.38 5.75,17.38 8.12,19.75 8.38,19.75 9.5,18.62 10.62,18.62 11.25,18 11.25,17.5 J1.3
LEDK  (via drill 0.3)
  Top 0.127: Q1.3 6.62,21.88 6.62,19.75 7.58,18.79 v8.67,18.79
  Bottom 0.127: J1.2 10.62,18 10.32,18.31 9.16,18.31 v8.67,18.79
MISO  (via drill 0.3)
  Top 0.127: v4,18.75 3.5,18.75 3.25,18.5 3,18.5 R8.1 | v9.25,28 10.5,26.75 v10.5,23.75 | v9.62,23.38 9.5,23.38 9.75,23.12 9.75,22.75 D2.2 9.54,22.97 9.54,23.09 9.43,23.2 8.87,23.2 8.42,22.75 v8.42,20.83 | IC5.33 15.25,18.62 17.25,20.62 18,20.62 22.38,20.62 v22.42,20.58 | v13.25,22.62 14.75,21.12 16.73,21.12 17.25,21.12
  Top 0.13: 16.73,21.12 17.5,21.12 18,20.62
  Bottom 0.127: v4,18.75 4.62,19.38 6.88,19.38 8.33,20.83 v8.42,20.83 | v9.25,28 8.12,29.12 IC2.2 | v9.62,23.38 10.12,23.38 v10.5,23.75 12.12,23.75 v13.25,22.62 | J3.P7 23.5,21.12 22.96,21.12 v22.42,20.58
MOSI  (via drill 0.3)
  Top 0.127: v5.38,24.88 5.12,24.62 4.12,24.62 R6.1 | v14.25,12.12 13.62,11.5 13.62,11.07 IC5.31 | v21.38,15.38 20.12,14.12 v16.38,14.12 | D3.2 9.85,20.6 v10.38,21.12
  Bottom 0.127: v10.38,21.12 10.75,21.5 10.75,21.88 IC2.5 | v5.38,24.88 7,23.25 9.12,23.25 9.5,22.88 9.88,22.88 10.75,22 | 10.75,22 IC2.5 | 14.25,12 v14.25,12.12 14.25,12 | 14.25,12 14.25,11.75 13.88,11.38 12.5,11.38 12.25,11.62 12.25,13.25 11.62,13.88 10.78,13.88 J1.10 | v21.38,15.38 22.62,16.62 23.5,16.62 J3.P3 | 14.25,12 v16.38,14.12 16.38,17.25 13.49,20.14 12.52,20.14 12.41,20.25 12.41,20.97 11.38,22 10.75,22 | 10.75,22 IC2.5
N$1  (via drill 0.3)
  Top 0.127: 2.75,20.38 2.88,20.5 R11.1 2.75,20.38 | 2.75,20.38 2,19.62 2,19.5 1.62,19.5 R12.2 | v7.12,20.88 7.38,21.12 7.38,23.5 7.5,23.62 Q1.1 | v6.12,20.75 5.5,20.75 3.88,22.38 2.72,22.38 2.36,22.02 2.36,20.96 2.75,20.57 2.75,20.38
  Bottom 0.127: v7.12,20.88 7,20.75 v6.12,20.75
N$2  (via drill 0.3)
  Top 0.127: 5.12,18.12 4.88,18.12 IC4.3 5.12,18.12 | IC4.1 4.88,19.88 5.25,19.88 5.58,19.55 5.58,18.58 5.12,18.12 | 5.12,18.12 5.12,16.73 5.12,16 6.5,14.62 6.85,14.62 T1.2 7.57,14.55 8.12,14 8.12,13.12 8.38,12.88 8.38,11.75 v8.62,11.5 | v9.25,10.88 9.25,10.25 9.88,9.62 D1.1 | 4,14.88 4,10.91 4.88,10.03 C1_BAT1.1
  Top 0.13: 4,14.88 4,15.61 5.12,16.73
  Bottom 0.127: v8.62,11.5 v9.25,10.88
N$3
  Top 0.127: 19.25,32.39 SJ2.2 | R7-ESP1.2 16.96,32.16 16.96,31.46 17.07,31.35 18.4,31.35 18.51,31.46 18.51,31.66 19.25,32.39 | R6-ESP1.1 23.38,31.68 22.99,31.29 20.14,31.29 20.03,31.41 20.03,31.62 19.25,32.39
N$4  (via drill 0.3)
  Top 0.127: J2.A5 17,6.43 15.44,4.88 v13.38,4.88
  Bottom 0.127: v13.38,4.88 11.88,4.88 11,4 11,2.5 11.88,1.62 15.75,1.62 R1-USB.1
N$5
  Top 0.127: R6-ESP1.2 23.38,32.88 22.38,32.88 22.38,32.38 SJ1.1
N$6  (via drill 0.3)
  Top 0.127: v21.25,3.62 20,4.88 20,6.88 J2.B5
  Bottom 0.127: v21.25,3.62 21.25,3 R2-USB.2
N$7  (via drill 0.3)
  Top 0.127: MCP73831.5 7.12,11.75 6.77,12.11 5.74,12.11 5.24,12.61 v5.11,12.61 | R2_BAT.2 3,14.54 3.48,15.02 v3.5,15.02
  Bottom 0.127: v5.11,12.61 5.11,12.64 3.5,14.25 v3.5,15.02
N$8
  pour Bottom: -0.98,-2.25 36.98,-2.25 36.98,38.25 -0.98,38.25
N$11
  pour Top: -0.98,-2.25 36.98,-2.25 36.98,38.25 -0.98,38.25
N$12  (via drill 0.3)
  Top 0.127: MCP73831.1 9.62,11.62 9.38,11.62 v8.35,10.6
  Bottom 0.127: R1_BAT.1 6.59,8.83 v8.35,10.6
N$13  (via drill 0.3)
  Top 0.127: v24.5,26 24.5,27.38 23.5,28.38 C1.1 | IC6.1 17.38,30 18.25,30 18.38,29.88 18.38,28.88 21.66,25.59 22.33,25.59 22.51,25.41 22.51,24.52 22.62,24.41 v22.62,24.12
  Bottom 0.127: v24.5,26 v22.62,24.12
N$14
  Bottom 0.127: CHG_LED.C 17.63,4.88 17,4.88 16.12,5.75 16.12,6.12 12.38,9.88 8.97,9.88 R1_BAT.2
PIN_LED  (via drill 0.3)
  Top 0.127: v6,15.75 6.88,15.75 8.5,14.12 8.5,13.12 11,13.12 12,12.12 12.43,12.12 IC5.30 | R11.2 1.5,20.5 1,21 1,22.38 v1.62,23
  Bottom 0.127: v6,15.75 4.88,16.88 4.5,16.88 2.12,19.25 2.12,22.5 v1.62,23
PPG_INT  (via drill 0.3)
  Top 0.127: v27.19,13.31 27.32,13.44 v27.32,21.7 | v22.8,8.86 22.54,9.12 19.66,9.12 18.26,10.52 18.26,10.54 IC5.36
  Bottom 0.127: v27.19,13.31 27.19,12.94 23.41,9.16 23.1,9.16 v22.8,8.86 | v27.32,21.7 27.67,22.06 27.67,25.72 27.22,26.17 26.49,26.17 25.42,27.24 TP8.TP
RESET  (via drill 0.3)
  Top 0.127: RESET_BUTTON.4 31.62,7.5 28.5,4.38 RESET_BUTTON.3 28.38,4.25 27.38,3.25 27.25,3.25 26.25,4.25 26.25,4.62 26.5,4.88 26.5,5 C5.1 26.62,5.12 26.62,5.52 27.65,6.54 27.65,7.45 R1-ESP.1 27.56,7.86 27.17,7.86 25.5,9.53 25.5,11 | 25.5,11 IC5.45 25.5,11 | v24.12,13.25 24.12,24.12 v24.25,24.25 | 25.5,11 v25.5,11.88
  Bottom 0.127: v25.5,11.88 v24.12,13.25 | TP9.TP 23.38,26.62 24.5,26.62 25,26.12 25,25.07 24.25,24.32 v24.25,24.25
RX  (via drill 0.3)
  Top 0.127: v21.5,13.5 21.5,12.25 21.25,12 21.25,11 IC5.40
  Bottom 0.127: v21.5,13.5 21.5,14.25 19.5,16.25 19.5,25.62 19.12,26 19.12,26.62 TP11.TP
SCK  (via drill 0.3)
  Top 0.127: v4.38,25.25 3.62,25.25 3,24.62 R5.1 | 16.73,10.25 14.88,10.25 14.62,10.5 14.62,10.78 IC5.32 14.38,10.97 14.38,10.25 v13.5,9.38 | 17.38,11.62 17.75,12 19.38,12 22.5,15.12 22.5,18.44 v22.37,18.56 | v9.96,19.12 9.96,19.08 9.88,19 9.88,18.25 D4.2 9.88,18.12 9.88,17.77 v8.87,16.77
  Top 0.13: 17.38,11.62 17.38,10.55 17.07,10.25 16.73,10.25
  Bottom 0.127: 8.86,16.75 9.12,16.75 10.5,15.38 10.88,15.38 11.25,15 11.25,14.5 J1.9 | v4.38,25.25 6.75,22.88 8.38,22.88 9.38,21.88 | 9.38,21.88 IC2.6 9.38,21.88 | 9.38,21.88 9.38,21.38 10.12,20.62 10.12,19.29 v9.96,19.12 | J3.P5 23.5,19 23.38,19.12 22.96,19.12 22.4,18.56 v22.37,18.56 | v13.5,9.38 12.62,10.25 12.25,10.25 7.75,14.75 7.75,16.12 8.38,16.75 8.86,16.75 | v8.87,16.77 8.86,16.75
SCL  (via drill 0.3)
  Top 0.127: v13.12,25.75 13.12,26.88 12,28 IC3.8 | v14.75,24.12 15.25,24.62 IC5.13 15.25,28.16 | 15.25,28.16 15.25,28.25 | IC6.2 17.25,29.5 16.73,29.5 16.52,29.5 16.36,29.34 15.95,28.94 | v15.75,27.75 15.75,28.73 15.95,28.94 | 15.25,28.16 15.95,28.86 15.95,28.94
  Bottom 0.127: v14.75,24.12 v13.12,25.75 | v15.75,27.75 15.88,27.75 16.88,28.76 TP6.TP
SDA  (via drill 0.3)
  Top 0.127: IC6.3 17.25,29 16.38,29 16.25,28.88 16.25,27.62 16.12,27.5 16.12,25 IC5.12 16,25 15.88,24.88 15.88,24.5 v15.5,24.12 | v13.75,27.75 13.12,27.75 12.25,28.62 11.75,28.62 11.62,28.5 10.88,28.5 IC3.9
  Bottom 0.127: TP7.TP 14.75,28.75 v13.75,27.75 13.38,27.38 13.38,26.25 v15.5,24.12
SS  (via drill 0.3)
  Top 0.127: 8.5,15.62 8.88,15.25 9.5,15.25 9.75,15.5 9.75,16 D5.2 | v22,15.25 19.12,12.38 15.75,12.38 v15.75,12.5 | R4.1 3.27,21.12 4.75,21.12 6,19.88 6,17.86 8.19,15.67 8.45,15.67 8.5,15.62 | 8.5,15.62 8.5,15.59 v8.54,15.54
  Bottom 0.127: v22,15.25 22.25,15.5 23.12,15.5 J3.P2 | v15.75,12.5 14.25,11 11.88,11 8.12,14.75 8.12,15.12 v8.54,15.54
SS_FLASH  (via drill 0.3)
  Top 0.127: v10.75,23.12 10.5,23.12 8.62,25 v8.62,28 | IC5.18 11.92,22.25 v11.67,22.5
  Bottom 0.127: v10.75,23.12 11.38,22.5 v11.67,22.5 | v8.62,28 6.88,29.75 IC2.1
SS_TFT  (via drill 0.3)
  Top 0.127: IC5.21 11.84,19.7 10.91,18.77 10.91,15.16 v10.25,14.5
  Bottom 0.127: v10.25,14.5 10.62,14.88 J1.8
TFT_DC  (via drill 0.3)
  Top 0.127: v13.38,17.12 13.25,17.25 13.25,18.38 12.88,18.75 12.5,18.75 IC5.22
  Bottom 0.127: v13.38,17.12 13,17.12 11.38,15.5 J1.7
TX  (via drill 0.3)
  Top 0.127: v21,12.38 20.38,11.75 20.38,11 IC5.39
  Bottom 0.127: v21,12.38 22,13.38 22,14.12 20.75,15.38 20.75,25.62 21.12,26 21.12,26.62 TP12.TP
VBAT  (via drill 0.3)
  Top 0.127: 22.12,33.38 22.25,33.5 | 20.88,32.38 SJ1.2 | 8.5,14.88 v8.62,14.88 | 9.62,13.88 9.62,13.62 MCP73831.3 | 15.83,20.58 v15.92,20.58 | 6,16.62 T1.3
  Top 0.15: 14.5,19.25 12.99,19.25 12.98,19.25 11.88,19.25
  Top 0.25: 11.25,14.5 11.25,18.62
  Top 0.3: v17.38,33.5 17.75,33.5 18.62,34.38 20.54,34.38 20.88,34.38 21.38,34.88 v21.62,34.88 | 22.12,33.38 20.88,33.38 20.88,32.38 | 9.62,13.88 v9.25,14.25 | 11.25,14.5 10.38,13.62 9.76,13.62 MCP73831.3 | v18.42,23.17 18.84,22.75 22.75,22.75 v23.25,23.25 | 14.5,19.25 15.83,20.58 | v26.72,25.75 26.72,26.08 26.07,26.73 26.07,27.7 26.37,27.99 26.95,27.99 28.9,29.95 v28.94,29.95 | 11.25,18.62 11.88,19.25 | 6,16.62 6.75,16.62 7.88,15.5 8.5,14.88 | v23.77,33.68 23.69,33.61 22.36,33.61 22.25,33.5
  Bottom 0.127: 17.38,32.5 C2_BAT.1 | 18.25,23 18.25,23.12 18.38,23.12 v18.42,23.17 | 16.88,26.62 TP5.TP
  Bottom 0.3: 17.38,32.5 v17.38,33.5 | v9.25,14.25 v8.62,14.88 | 16.88,26.62 16.88,24.88 18.25,23.5 18.25,23.12 | v23.25,23.25 24.33,23.25 26.72,25.64 v26.72,25.75 | 18.25,23 18.25,21.73 17.91,21.39 16.73,21.39 v15.92,20.58 | 23.77,33.5 25.39,33.5 27.43,31.46 27.43,30.58 27.72,30.28 28.61,30.28 v28.94,29.95 | 23.77,33.5 23.05,33.5 22.14,34.4 22.1,34.4 v21.62,34.88 | 23.77,33.5 v23.77,33.68 23.77,33.5
VBUS  (via drill 0.3)
  Top 0.127: 7.25,13.38 7.25,13.5 MCP73831.4 7.12,13.5 | D1.2 7.75,9.62 | 5.12,14.5 T1.1 5,14.5 | 18.88,2.88 v18.75,2.75
  Top 0.3: 7.25,13.38 8,12.62 8.02,12.61 8.02,11.31 7.75,11.04 7.75,10.38 | 5.12,14.5 5.5,14.5 6.5,13.5 7.12,13.5 | v18.88,4 18.88,2.88 | v14.62,2.75 v18.75,2.75 | 5,14.5 5,13.44 v5.86,12.57 | v30.38,28.88 31.31,27.94 31.39,27.86 31.39,27.17 30.15,25.93 28.57,25.93 28.21,25.57 28.25,25.53 28.25,24.02 28.25,12.62 v27.25,11.62 | 7.75,9.62 7.75,10.38 | v9.12,8.12 9.12,9.01 7.75,10.38
  Bottom 0.127: 19.25,4.88 CHG_LED.A 19.25,4.38 | 10.25,7.62 10.12,7.75 R1_PWRUSB.2 10.25,7.62 | 12.38,4 C1_BAT.1 | 19.88,31.88 PFMF.050.1.2 | 10.25,7.62 9.62,7.62 | 2.55,15.94 2.41,15.8 | 19.25,6.12 19.25,6.25 C4_USB.1 19.25,6.12
  Bottom 0.3: 19.25,4.88 19.25,6.12 19.75,6.62 20.54,6.62 22.25,6.62 v27.25,11.62 | 19.25,4.38 v18.88,4 | 13.88,3.5 13.88,3.49 14.4,2.97 | 14.4,2.97 v14.62,2.75 | 9.62,7.62 v9.12,8.12 | 2.41,15.8 C5_USB.1 | 19.88,31.88 24.35,31.88 26.3,31.88 27,31.18 27,30.4 27.55,29.86 28.32,29.86 28.73,29.45 29.8,29.45 v30.38,28.88 | v18.75,2.75 19.5,2.75 D6.5 | C1_BAT.1 13.41,3.96 14.4,2.97 | R1_PWRUSB.2 11.7,7.79 14.19,5.3 14.4,5.09 14.4,2.97 | v5.86,12.57 4,14.44 4,15.23 3.3,15.94 2.55,15.94
VIBE_OUT+  (via drill 0.3)
  Top 0.127: 21.62,29.5 IC6.9
  Top 0.3: v20.12,29.75 20.38,29.5 21.62,29.5
  Bottom 0.127: 21.12,28.75 TP1.TP
  Bottom 0.3: v20.12,29.75 21.12,28.75
VIBE_OUT-  (via drill 0.3)
  Top 0.127: IC6.7 21.62,28.5
  Top 0.3: v20.12,27.88 20.33,27.88 20.96,28.5 21.62,28.5
  Bottom 0.127: 19.12,28.88 TP2.TP
  Bottom 0.3: v20.12,27.88 19.12,28.88
VUSB  (via drill 0.3)
  Top 0.127: 16,7 15.75,7 J2.A4 | 16,7 J2.B9 16,7 | 20.5,7 20.75,7 J2.A9 | 20.5,7 J2.B4 20.5,7 | v27.38,12.5 27.82,12.94 | v22.73,30.5 15.49,30.5 v13.92,32.07
  Top 0.3: 27.82,12.94 27.82,25.36 27.73,25.44 27.73,25.69 28.4,26.35 28.87,26.82 v28.98,26.82 | 20.5,7 20.43,7.07 20.43,7.67 20.01,8.09 19.27,8.09 16.49,8.09 16.07,7.67 16.07,7.07 16,7 | v20.5,8.12 20.75,7.88 20.75,7
  Bottom 0.3: v27.38,12.5 23.53,8.66 23,8.12 v20.5,8.12 | v22.73,30.5 25.62,30.5 26.76,29.37 26.76,28.28 26.07,27.59 26.07,27.28 26.42,26.93 26.84,26.93 27.14,27.24 27.45,27.24 27.87,26.82 v28.98,26.82 | PFMF.050.1.1 14.01,31.98 v13.92,32.07
(copper drawn outside any net)
  shapes: Bottom area x1, Top area x1

## Text on the board
bPlace: BOOT | SCL | GND | SDA | VIBE_OUT- | VIBE_OUT- | 3V3 | VBAT | RX | TX | RESET